# Altium PCB Intelligent_Agriculture.PcbDoc (part 3 of 5)
Units mm, origin at the board's own origin, x right, y up, seen from the top; angles counter-clockwise.
Board outline 99.69 x 99.69 mm, 2 copper layers (Top Layer, Bottom Layer); 90 components, 60 nets, 339 pads, 86 vias.
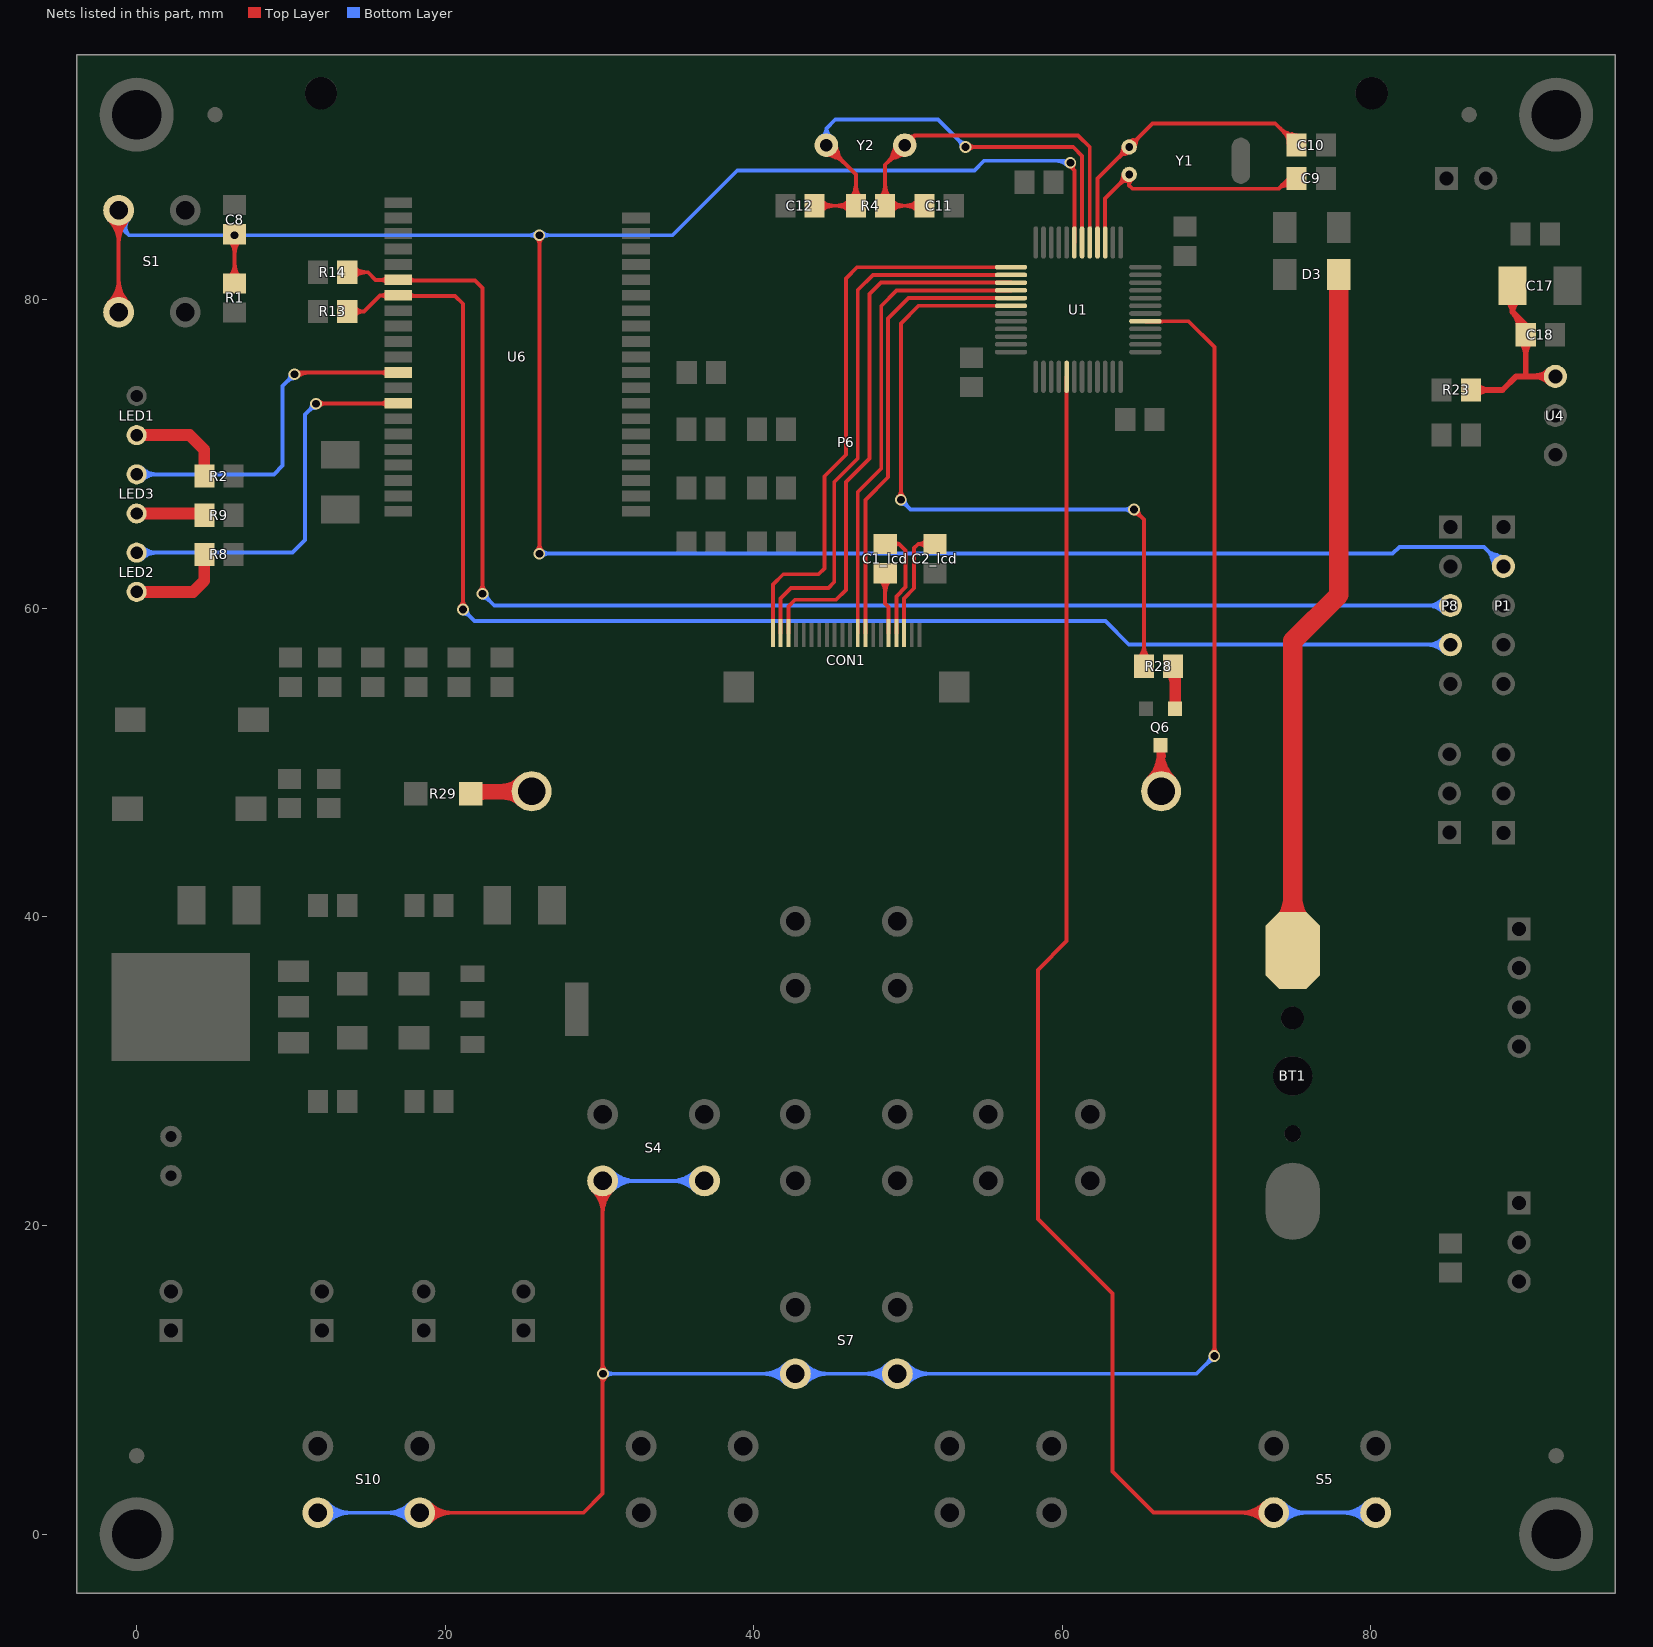
[diagram p3: the nets of this part, all layers, seen from the top]

## Via types
v1: diameter 0.762, hole 0.508, Top Layer to Bottom Layer, tented both sides, 82 vias
v2: diameter 4.8, hole 3.2, Top Layer to Bottom Layer, tented both sides, 4 vias

## Nets (pads, with @x,y where several pads share a name; then routed paths per layer and width w, separated by ;. In a path a pad name is that pad's centre, name@x,y a point inside that pad or via, vN(x,y) a via of type N, cw(c..) or ccw(c..) an arc to the next point about the centre after c; other vN are vias at no path point) (continued)
KEY_O3: S4.2 S4.3 S7.2 S7.3 S10.2 S10.3 U1.41 | length 341.8
  Top Layer w0.254: S10.2@18.352,1.385 28.956,1.385 30.198,2.627 S4.3@30.198,22.892 ; 66.472,78.581 65.411,78.581 U1.41@65.378,78.613 68.182,78.613 69.85,76.945 v1(69.85,11.54) ; S10.2@18.79,0.947 cw(c19.846,-0.109) 19.846,1.385 ; S10.2@18.79,0.947 cw(c19.846,-0.109) 19.846,1.385 ; S10.2@18.79,0.947 cw(c19.846,-0.109) 19.846,1.385 ; S10.2@18.79,1.823 ccw(c19.846,2.879) 19.846,1.385 ; S10.2@18.79,1.823 ccw(c19.846,2.879) 19.846,1.385 ; S10.2@18.79,1.823 ccw(c19.846,2.879) 19.846,1.385 ; S10.2@18.969,0.768 cw(c20.46,-0.723) 20.46,1.385 ; S10.2@18.969,0.768 cw(c20.46,-0.723) 20.46,1.385 ; S10.2@18.969,0.768 cw(c20.46,-0.723) 20.46,1.385 ; S10.2@18.969,2.002 ccw(c20.46,3.493) 20.46,1.385 ; S10.2@18.969,2.002 ccw(c20.46,3.493) 20.46,1.385 ; S10.2@18.969,2.002 ccw(c20.46,3.493) 20.46,1.385 ; S4.3@29.581,22.275 cw(c28.09,20.784) 30.198,20.784 ; S4.3@29.581,22.275 cw(c28.09,20.784) 30.198,20.784 ; S4.3@29.581,22.275 cw(c28.09,20.784) 30.198,20.784 ; S4.3@29.76,22.454 cw(c28.704,21.398) 30.198,21.398 ; S4.3@29.76,22.454 cw(c28.704,21.398) 30.198,21.398 ; S4.3@29.76,22.454 cw(c28.704,21.398) 30.198,21.398 ; v1@30.051,10.212 cw(c29.697,9.858) 30.198,9.858 ; v1@30.051,10.212 cw(c29.697,9.858) 30.198,9.858 ; v1@30.051,10.212 cw(c29.697,9.858) 30.198,9.858 ; v1@30.051,10.572 ccw(c29.697,10.926) 30.198,10.926 ; v1@30.051,10.572 ccw(c29.697,10.926) 30.198,10.926 ; v1@30.051,10.572 ccw(c29.697,10.926) 30.198,10.926 ; 30.198,9.699 cw(c30.924,9.699) v1@30.411,10.212 ; 30.198,9.699 cw(c30.924,9.699) v1@30.411,10.212 ; 30.198,9.699 cw(c30.924,9.699) v1@30.411,10.212 ; 30.198,11.085 ccw(c30.924,11.085) v1@30.411,10.572 ; 30.198,11.085 ccw(c30.924,11.085) v1@30.411,10.572 ; 30.198,11.085 ccw(c30.924,11.085) v1@30.411,10.572 ; 30.198,20.784 cw(c32.306,20.784) S4.3@30.815,22.275 ; 30.198,20.784 cw(c32.306,20.784) S4.3@30.815,22.275 ; 30.198,20.784 cw(c32.306,20.784) S4.3@30.815,22.275 ; 30.198,21.398 cw(c31.692,21.398) S4.3@30.636,22.454 ; 30.198,21.398 cw(c31.692,21.398) S4.3@30.636,22.454 ; 30.198,21.398 cw(c31.692,21.398) S4.3@30.636,22.454 ; v1@69.67,11.72 ccw(c69.237,12.153) 69.85,12.153 ; v1@69.67,11.72 ccw(c69.237,12.153) 69.85,12.153 ; v1@69.67,11.72 ccw(c69.237,12.153) 69.85,12.153 ; 69.85,12.153 ccw(c70.463,12.153) v1@70.03,11.72 ; 69.85,12.153 ccw(c70.463,12.153) v1@70.03,11.72 ; 69.85,12.153 ccw(c70.463,12.153) v1@70.03,11.72
  Bottom Layer w0.254: S10.3@11.748,1.385 S10.2@18.352,1.385 ; S4.3@30.198,22.892 S4.2@36.802,22.892 ; v1(30.231,10.392) S7.3@42.698,10.392 S7.2@49.302,10.392 68.702,10.392 v1(69.85,11.54) ; S10.3@12.186,0.947 cw(c13.242,-0.109) 13.242,1.385 ; S10.3@12.186,0.947 cw(c13.242,-0.109) 13.242,1.385 ; S10.3@12.186,0.947 cw(c13.242,-0.109) 13.242,1.385 ; S10.3@12.186,1.823 ccw(c13.242,2.879) 13.242,1.385 ; S10.3@12.186,1.823 ccw(c13.242,2.879) 13.242,1.385 ; S10.3@12.186,1.823 ccw(c13.242,2.879) 13.242,1.385 ; S10.3@12.365,0.768 cw(c13.856,-0.723) 13.856,1.385 ; S10.3@12.365,0.768 cw(c13.856,-0.723) 13.856,1.385 ; S10.3@12.365,0.768 cw(c13.856,-0.723) 13.856,1.385 ; S10.3@12.365,2.002 ccw(c13.856,3.493) 13.856,1.385 ; S10.3@12.365,2.002 ccw(c13.856,3.493) 13.856,1.385 ; S10.3@12.365,2.002 ccw(c13.856,3.493) 13.856,1.385 ; 16.244,1.385 ccw(c16.244,3.493) S10.2@17.735,2.002 ; 16.244,1.385 cw(c16.244,-0.723) S10.2@17.735,0.768 ; 16.244,1.385 ccw(c16.244,3.493) S10.2@17.735,2.002 ; 16.244,1.385 cw(c16.244,-0.723) S10.2@17.735,0.768 ; 16.244,1.385 ccw(c16.244,3.493) S10.2@17.735,2.002 ; 16.244,1.385 cw(c16.244,-0.723) S10.2@17.735,0.768 ; 16.858,1.385 ccw(c16.858,2.879) S10.2@17.914,1.823 ; 16.858,1.385 cw(c16.858,-0.109) S10.2@17.914,0.947 ; 16.858,1.385 ccw(c16.858,2.879) S10.2@17.914,1.823 ; 16.858,1.385 cw(c16.858,-0.109) S10.2@17.914,0.947 ; 16.858,1.385 ccw(c16.858,2.879) S10.2@17.914,1.823 ; 16.858,1.385 cw(c16.858,-0.109) S10.2@17.914,0.947 ; v1@30.411,10.212 cw(c30.844,9.779) 30.844,10.392 ; v1@30.411,10.212 cw(c30.844,9.779) 30.844,10.392 ; v1@30.411,10.212 cw(c30.844,9.779) 30.844,10.392 ; v1@30.411,10.572 ccw(c30.844,11.005) 30.844,10.392 ; v1@30.411,10.572 ccw(c30.844,11.005) 30.844,10.392 ; v1@30.411,10.572 ccw(c30.844,11.005) 30.844,10.392 ; S4.3@30.636,22.454 cw(c31.692,21.398) 31.692,22.892 ; S4.3@30.636,22.454 cw(c31.692,21.398) 31.692,22.892 ; S4.3@30.636,22.454 cw(c31.692,21.398) 31.692,22.892 ; S4.3@30.636,23.33 ccw(c31.692,24.386) 31.692,22.892 ; S4.3@30.636,23.33 ccw(c31.692,24.386) 31.692,22.892 ; S4.3@30.636,23.33 ccw(c31.692,24.386) 31.692,22.892 ; S4.3@30.815,22.275 cw(c32.306,20.784) 32.306,22.892 ; S4.3@30.815,22.275 cw(c32.306,20.784) 32.306,22.892 ; S4.3@30.815,22.275 cw(c32.306,20.784) 32.306,22.892 ; S4.3@30.815,23.509 ccw(c32.306,25) 32.306,22.892 ; S4.3@30.815,23.509 ccw(c32.306,25) 32.306,22.892 ; S4.3@30.815,23.509 ccw(c32.306,25) 32.306,22.892 ; 34.694,22.892 ccw(c34.694,25) S4.2@36.185,23.509 ; 34.694,22.892 cw(c34.694,20.784) S4.2@36.185,22.275 ; 34.694,22.892 ccw(c34.694,25) S4.2@36.185,23.509 ; 34.694,22.892 cw(c34.694,20.784) S4.2@36.185,22.275 ; 34.694,22.892 ccw(c34.694,25) S4.2@36.185,23.509 ; 34.694,22.892 cw(c34.694,20.784) S4.2@36.185,22.275 ; 35.308,22.892 ccw(c35.308,24.386) S4.2@36.364,23.33 ; 35.308,22.892 cw(c35.308,21.398) S4.2@36.364,22.454 ; 35.308,22.892 ccw(c35.308,24.386) S4.2@36.364,23.33 ; 35.308,22.892 cw(c35.308,21.398) S4.2@36.364,22.454 ; 35.308,22.892 ccw(c35.308,24.386) S4.2@36.364,23.33 ; 35.308,22.892 cw(c35.308,21.398) S4.2@36.364,22.454 ; 40.59,10.392 ccw(c40.59,12.5) S7.3@42.081,11.009 ; 40.59,10.392 cw(c40.59,8.284) S7.3@42.081,9.775 ; 40.59,10.392 ccw(c40.59,12.5) S7.3@42.081,11.009 ; 40.59,10.392 cw(c40.59,8.284) S7.3@42.081,9.775 ; 40.59,10.392 ccw(c40.59,12.5) S7.3@42.081,11.009 ; 40.59,10.392 cw(c40.59,8.284) S7.3@42.081,9.775 ; 41.204,10.392 ccw(c41.204,11.886) S7.3@42.26,10.83 ; 41.204,10.392 cw(c41.204,8.898) S7.3@42.26,9.954 ; 41.204,10.392 ccw(c41.204,11.886) S7.3@42.26,10.83 ; 41.204,10.392 cw(c41.204,8.898) S7.3@42.26,9.954 ; 41.204,10.392 ccw(c41.204,11.886) S7.3@42.26,10.83 ; 41.204,10.392 cw(c41.204,8.898) S7.3@42.26,9.954 ; S7.3@43.136,9.954 cw(c44.192,8.898) 44.192,10.392 ; S7.3@43.136,9.954 cw(c44.192,8.898) 44.192,10.392 ; S7.3@43.136,9.954 cw(c44.192,8.898) 44.192,10.392 ; S7.3@43.136,10.83 ccw(c44.192,11.886) 44.192,10.392 ; S7.3@43.136,10.83 ccw(c44.192,11.886) 44.192,10.392 ; S7.3@43.136,10.83 ccw(c44.192,11.886) 44.192,10.392 ; S7.3@43.315,9.775 cw(c44.806,8.284) 44.806,10.392 ; S7.3@43.315,9.775 cw(c44.806,8.284) 44.806,10.392 ; S7.3@43.315,9.775 cw(c44.806,8.284) 44.806,10.392 ; S7.3@43.315,11.009 ccw(c44.806,12.5) 44.806,10.392 ; S7.3@43.315,11.009 ccw(c44.806,12.5) 44.806,10.392 ; S7.3@43.315,11.009 ccw(c44.806,12.5) 44.806,10.392 ; 47.194,10.392 ccw(c47.194,12.5) S7.2@48.685,11.009 ; 47.194,10.392 cw(c47.194,8.284) S7.2@48.685,9.775 ; 47.194,10.392 ccw(c47.194,12.5) S7.2@48.685,11.009 ; 47.194,10.392 cw(c47.194,8.284) S7.2@48.685,9.775 ; 47.194,10.392 ccw(c47.194,12.5) S7.2@48.685,11.009 ; 47.194,10.392 cw(c47.194,8.284) S7.2@48.685,9.775 ; 47.808,10.392 ccw(c47.808,11.886) S7.2@48.864,10.83 ; 47.808,10.392 cw(c47.808,8.898) S7.2@48.864,9.954 ; 47.808,10.392 ccw(c47.808,11.886) S7.2@48.864,10.83 ; 47.808,10.392 cw(c47.808,8.898) S7.2@48.864,9.954 ; 47.808,10.392 ccw(c47.808,11.886) S7.2@48.864,10.83 ; 47.808,10.392 cw(c47.808,8.898) S7.2@48.864,9.954 ; S7.2@49.74,9.954 cw(c50.796,8.898) 50.796,10.392 ; S7.2@49.74,9.954 cw(c50.796,8.898) 50.796,10.392 ; S7.2@49.74,9.954 cw(c50.796,8.898) 50.796,10.392 ; S7.2@49.74,10.83 ccw(c50.796,11.886) 50.796,10.392 ; S7.2@49.74,10.83 ccw(c50.796,11.886) 50.796,10.392 ; S7.2@49.74,10.83 ccw(c50.796,11.886) 50.796,10.392 ; S7.2@49.919,9.775 cw(c51.41,8.284) 51.41,10.392 ; S7.2@49.919,9.775 cw(c51.41,8.284) 51.41,10.392 ; S7.2@49.919,9.775 cw(c51.41,8.284) 51.41,10.392 ; S7.2@49.919,11.009 ccw(c51.41,12.5) 51.41,10.392 ; S7.2@49.919,11.009 ccw(c51.41,12.5) 51.41,10.392 ; S7.2@49.919,11.009 ccw(c51.41,12.5) 51.41,10.392 ; 69.416,11.106 ccw(c68.983,11.54) v1@69.596,11.54 ; 69.416,11.106 cw(c69.85,10.673) v1@69.85,11.286 ; 69.416,11.106 ccw(c68.983,11.54) v1@69.596,11.54 ; 69.416,11.106 cw(c69.85,10.673) v1@69.85,11.286 ; 69.416,11.106 ccw(c68.983,11.54) v1@69.596,11.54 ; 69.416,11.106 cw(c69.85,10.673) v1@69.85,11.286
KEY_WAIT: S5.2 S5.3 U1.29 | length 142.8
  Top Layer w0.254: U1.29@60.274,75.009 60.274,38.43 58.42,36.576 58.42,20.43 63.246,15.604 63.246,4.047 65.901,1.392 S5.3@73.698,1.392 ; 71.59,1.392 ccw(c71.59,3.5) S5.3@73.081,2.009 ; 71.59,1.392 cw(c71.59,-0.716) S5.3@73.081,0.775 ; 71.59,1.392 ccw(c71.59,3.5) S5.3@73.081,2.009 ; 71.59,1.392 cw(c71.59,-0.716) S5.3@73.081,0.775 ; 71.59,1.392 ccw(c71.59,3.5) S5.3@73.081,2.009 ; 71.59,1.392 cw(c71.59,-0.716) S5.3@73.081,0.775 ; 72.204,1.392 ccw(c72.204,2.886) S5.3@73.26,1.83 ; 72.204,1.392 cw(c72.204,-0.102) S5.3@73.26,0.954 ; 72.204,1.392 ccw(c72.204,2.886) S5.3@73.26,1.83 ; 72.204,1.392 cw(c72.204,-0.102) S5.3@73.26,0.954 ; 72.204,1.392 ccw(c72.204,2.886) S5.3@73.26,1.83 ; 72.204,1.392 cw(c72.204,-0.102) S5.3@73.26,0.954
  Bottom Layer w0.254: S5.3@73.698,1.392 S5.2@80.302,1.392 ; S5.3@74.136,0.954 cw(c75.192,-0.102) 75.192,1.392 ; S5.3@74.136,0.954 cw(c75.192,-0.102) 75.192,1.392 ; S5.3@74.136,0.954 cw(c75.192,-0.102) 75.192,1.392 ; S5.3@74.136,1.83 ccw(c75.192,2.886) 75.192,1.392 ; S5.3@74.136,1.83 ccw(c75.192,2.886) 75.192,1.392 ; S5.3@74.136,1.83 ccw(c75.192,2.886) 75.192,1.392 ; S5.3@74.315,0.775 cw(c75.806,-0.716) 75.806,1.392 ; S5.3@74.315,0.775 cw(c75.806,-0.716) 75.806,1.392 ; S5.3@74.315,0.775 cw(c75.806,-0.716) 75.806,1.392 ; S5.3@74.315,2.009 ccw(c75.806,3.5) 75.806,1.392 ; S5.3@74.315,2.009 ccw(c75.806,3.5) 75.806,1.392 ; S5.3@74.315,2.009 ccw(c75.806,3.5) 75.806,1.392 ; 78.194,1.392 ccw(c78.194,3.5) S5.2@79.685,2.009 ; 78.194,1.392 cw(c78.194,-0.716) S5.2@79.685,0.775 ; 78.194,1.392 ccw(c78.194,3.5) S5.2@79.685,2.009 ; 78.194,1.392 cw(c78.194,-0.716) S5.2@79.685,0.775 ; 78.194,1.392 ccw(c78.194,3.5) S5.2@79.685,2.009 ; 78.194,1.392 cw(c78.194,-0.716) S5.2@79.685,0.775 ; 78.808,1.392 ccw(c78.808,2.886) S5.2@79.864,1.83 ; 78.808,1.392 cw(c78.808,-0.102) S5.2@79.864,0.954 ; 78.808,1.392 ccw(c78.808,2.886) S5.2@79.864,1.83 ; 78.808,1.392 cw(c78.808,-0.102) S5.2@79.864,0.954 ; 78.808,1.392 ccw(c78.808,2.886) S5.2@79.864,1.83 ; 78.808,1.392 cw(c78.808,-0.102) S5.2@79.864,0.954
LCD_CS: CON1.1 U1.13 | length 37.3
  Top Layer w0.254: CON1.1@41.238,58.397 41.238,61.541 41.91,62.213 44.196,62.213 44.577,62.594 44.577,68.563 45.974,69.96 45.974,81.39 46.697,82.113 U1.13@56.67,82.113
LCD_LED: R28.2 U1.18 | length 65.3
  Top Layer w0.254: v1(49.53,67.039) 49.53,78.469 50.674,79.613 U1.18@56.67,79.613 ; R28.2@65.281,56.249 65.281,65.639 65.281,65.766 v1(64.643,66.404) ; v1@49.35,67.219 ccw(c48.917,67.652) 49.53,67.652 ; v1@49.35,67.219 ccw(c48.917,67.652) 49.53,67.652 ; v1@49.35,67.219 ccw(c48.917,67.652) 49.53,67.652 ; 49.53,67.652 ccw(c50.143,67.652) v1@49.71,67.219 ; 49.53,67.652 ccw(c50.143,67.652) v1@49.71,67.219 ; 49.53,67.652 ccw(c50.143,67.652) v1@49.71,67.219 ; v1@64.643,66.15 cw(c64.643,65.537) 65.077,65.97 ; v1@64.643,66.15 cw(c64.643,65.537) 65.077,65.97 ; v1@64.643,66.15 cw(c64.643,65.537) 65.077,65.97 ; v1(64.643,66.404) ccw(c65.078,66.493) 64.963,66.064 ; v1(64.643,66.404) cw(c64.554,65.969) 64.983,66.084 ; v1(64.643,66.404) ccw(c65.078,66.493) 64.963,66.064 ; v1(64.643,66.404) cw(c64.554,65.969) 64.983,66.084 ; v1(64.643,66.404) ccw(c65.078,66.493) 64.963,66.064 ; v1(64.643,66.404) cw(c64.554,65.969) 64.983,66.084 ; v1@64.897,66.404 ccw(c65.51,66.404) 65.077,65.97 ; v1@64.897,66.404 ccw(c65.51,66.404) 65.077,65.97 ; v1@64.897,66.404 ccw(c65.51,66.404) 65.077,65.97 ; R28.2@64.911,56.719 ccw(c64.018,57.612) 65.281,57.612 ; R28.2@64.911,56.719 ccw(c64.018,57.612) 65.281,57.612 ; R28.2@64.911,56.719 ccw(c64.018,57.612) 65.281,57.612 ; 65.281,57.612 ccw(c66.544,57.612) R28.2@65.651,56.719 ; 65.281,57.612 ccw(c66.544,57.612) R28.2@65.651,56.719 ; 65.281,57.612 ccw(c66.544,57.612) R28.2@65.651,56.719
  Bottom Layer w0.254: v1(49.53,67.039) 50.165,66.404 v1(64.643,66.404) ; v1@49.53,66.785 cw(c49.53,66.172) 49.964,66.605 ; v1@49.53,66.785 cw(c49.53,66.172) 49.964,66.605 ; v1@49.53,66.785 cw(c49.53,66.172) 49.964,66.605 ; v1@49.784,67.039 ccw(c50.397,67.039) 49.964,66.605 ; v1@49.784,67.039 ccw(c50.397,67.039) 49.964,66.605 ; v1@49.784,67.039 ccw(c50.397,67.039) 49.964,66.605 ; 64.03,66.404 ccw(c64.03,67.017) v1@64.463,66.584 ; 64.03,66.404 cw(c64.03,65.791) v1@64.463,66.224 ; 64.03,66.404 ccw(c64.03,67.017) v1@64.463,66.584 ; 64.03,66.404 cw(c64.03,65.791) v1@64.463,66.224 ; 64.03,66.404 ccw(c64.03,67.017) v1@64.463,66.584 ; 64.03,66.404 cw(c64.03,65.791) v1@64.463,66.224
LCD_RS: CON1.3 U1.15 | length 35.2
  Top Layer w0.254: CON1.3@42.238,58.397 42.238,60.128 42.672,60.562 45.339,60.562 45.974,61.197 45.974,68.182 47.498,69.706 47.498,80.374 48.237,81.113 U1.15@56.67,81.113
LCD_RST: CON1.2 U1.14 | length 36.1
  Top Layer w0.254: CON1.2@41.738,58.397 41.738,60.644 42.418,61.324 44.831,61.324 45.212,61.705 45.212,68.182 46.736,69.706 46.736,80.628 47.721,81.613 U1.14@56.67,81.613
LCD_SCK: CON1.12 U1.16 | length 30.7
  Top Layer w0.254: CON1.12@46.738,58.397 46.738,67.549 48.26,69.071 48.26,79.612 49.261,80.613 U1.16@56.67,80.613
LCD_SDA: CON1.13 U1.17 | length 29.5
  Top Layer w0.254: CON1.13@47.238,58.397 47.238,67.033 48.705,68.5 48.705,78.787 50.031,80.113 U1.17@56.67,80.113
NetBT1_1: BT1.1 D3.1 | length 57.7
  Top Layer w1.27: BT1.1@74.93,37.829 74.93,57.895 77.915,60.88 D3.1@77.915,81.649 ; BT1.1@74.142,39.367 ccw(c72.238,41.271) 74.93,41.271 ; BT1.1@74.142,39.367 ccw(c72.238,41.271) 74.93,41.271 ; BT1.1@74.142,39.367 ccw(c72.238,41.271) 74.93,41.271 ; 74.93,41.271 ccw(c77.622,41.271) BT1.1@75.718,39.367 ; 74.93,41.271 ccw(c77.622,41.271) BT1.1@75.718,39.367 ; 74.93,41.271 ccw(c77.622,41.271) BT1.1@75.718,39.367
NetC1_lcd_1: C1_lcd.1 CON1.16 | length 9.9
  Top Layer w0.254: C1_lcd.1@48.514,62.279 48.514,60.308 48.738,60.084 CON1.16@48.738,58.397 ; C1_lcd.1@48.144,61.909 cw(c47.251,61.016) 48.514,61.016 ; C1_lcd.1@48.144,61.909 cw(c47.251,61.016) 48.514,61.016 ; C1_lcd.1@48.144,61.909 cw(c47.251,61.016) 48.514,61.016 ; 48.514,61.016 cw(c49.777,61.016) C1_lcd.1@48.884,61.909 ; 48.514,61.016 cw(c49.777,61.016) C1_lcd.1@48.884,61.909 ; 48.514,61.016 cw(c49.777,61.016) C1_lcd.1@48.884,61.909
NetC1_lcd_2: C1_lcd.2 CON1.17 | length 9.6
  Top Layer w0.254: C1_lcd.2@48.514,64.179 49.418,64.179 ; CON1.17@49.238,58.397 49.238,60.778 49.835,61.375 49.835,63.762 49.418,64.179 ; C1_lcd.2@49.092,63.967 cw(c49.418,63.822) 49.418,64.179 ; C1_lcd.2@49.092,63.967 cw(c49.418,63.822) 49.418,64.179 ; C1_lcd.2@49.092,63.967 cw(c49.418,63.822) 49.418,64.179 ; C1_lcd.2@49.092,64.391 ccw(c49.418,64.536) 49.418,64.179 ; C1_lcd.2@49.092,64.391 ccw(c49.418,64.536) 49.418,64.179 ; C1_lcd.2@49.092,64.391 ccw(c49.418,64.536) 49.418,64.179
NetC2_lcd_1: C2_lcd.1 CON1.18 | length 10.6
  Top Layer w0.254: CON1.18@49.738,58.397 49.738,60.65 50.394,61.305 50.394,63.915 50.658,64.179 ; C2_lcd.1@51.181,64.179 50.658,64.179 ; 50.658,64.179 ccw(c50.658,64.839) C2_lcd.1@51.206,64.471 ; 50.658,64.179 cw(c50.658,63.519) C2_lcd.1@51.206,63.887 ; 50.658,64.179 ccw(c50.658,64.839) C2_lcd.1@51.206,64.471 ; 50.658,64.179 cw(c50.658,63.519) C2_lcd.1@51.206,63.887 ; 50.658,64.179 ccw(c50.658,64.839) C2_lcd.1@51.206,64.471 ; 50.658,64.179 cw(c50.658,63.519) C2_lcd.1@51.206,63.887
NetC17_1: C17.1 C18.1 R23.2 U4.3 | length 41.3
  Top Layer w0.381: R23.2@86.485,74.156 88.524,74.156 89.408,75.04 90.043,75.04 ; C17.1@89.179,80.907 89.179,79.206 ; U4.3@91.946,75.043 U4.3@91.949,75.04 90.043,75.04 ; R23.2@86.81,73.831 cw(c87.594,73.047) 87.594,74.156 ; R23.2@86.81,73.831 cw(c87.594,73.047) 87.594,74.156 ; R23.2@86.81,73.831 cw(c87.594,73.047) 87.594,74.156 ; R23.2@86.81,74.481 ccw(c87.594,75.265) 87.594,74.156 ; R23.2@86.81,74.481 ccw(c87.594,75.265) 87.594,74.156 ; R23.2@86.81,74.481 ccw(c87.594,75.265) 87.594,74.156 ; C17.1@88.776,79.973 cw(c88.246,79.206) 89.179,79.206 ; C17.1@88.776,79.973 cw(c88.246,79.206) 89.179,79.206 ; C17.1@88.776,79.973 cw(c88.246,79.206) 89.179,79.206 ; 89.179,79.206 cw(c88.152,78.178) C18.1@89.581,77.916 ; 89.179,79.206 cw(c90.112,79.206) C17.1@89.582,79.973 ; 89.179,79.206 cw(c88.152,78.178) C18.1@89.581,77.916 ; 89.179,79.206 cw(c90.112,79.206) C17.1@89.582,79.973 ; 89.179,79.206 cw(c88.152,78.178) C18.1@89.581,77.916 ; 89.179,79.206 cw(c90.112,79.206) C17.1@89.582,79.973 ; 89.179,79.206 90.033,78.352 C18.1@90.033,77.732 90.033,75.05 90.043,75.04 ; 89.692,78.693 cw(c89.019,78.019) C18.1@89.956,77.847 ; 89.692,78.693 cw(c89.019,78.019) C18.1@89.956,77.847 ; 89.692,78.693 cw(c89.019,78.019) C18.1@89.956,77.847 ; C18.1@89.708,77.307 cw(c88.923,76.523) 90.033,76.523 ; C18.1@89.708,77.307 cw(c88.923,76.523) 90.033,76.523 ; C18.1@89.708,77.307 cw(c88.923,76.523) 90.033,76.523 ; 90.033,76.523 cw(c91.142,76.523) C18.1@90.358,77.307 ; 90.033,76.523 cw(c91.142,76.523) C18.1@90.358,77.307 ; 90.033,76.523 cw(c91.142,76.523) C18.1@90.358,77.307 ; 90.598,75.04 ccw(c90.598,76.391) U4.3@91.553,75.436 ; 90.598,75.04 cw(c90.598,73.689) U4.3@91.553,74.644 ; 90.598,75.04 ccw(c90.598,76.391) U4.3@91.553,75.436 ; 90.598,75.04 cw(c90.598,73.689) U4.3@91.553,74.644 ; 90.598,75.04 ccw(c90.598,76.391) U4.3@91.553,75.436 ; 90.598,75.04 cw(c90.598,73.689) U4.3@91.553,74.644
NetLED1_1: LED1.1 R2.1 | length 6.5
  Top Layer w0.762: LED1.1@0,71.23 3.446,71.23 4.384,70.292 R2.1@4.384,68.58
NetLED2_1: LED2.1 R8.1 | length 6.4
  Top Layer w0.762: LED2.1@0,61.07 3.666,61.07 4.384,61.788 R8.1@4.384,63.5
NetLED2_2: LED2.2 U6.33 | length 39.5
  Top Layer w0.254: v1(11.616,73.262) 11.631,73.277 U6.33@16.477,73.277 ; v1@11.796,73.082 cw(c12.265,72.613) 12.265,73.277 ; v1@11.796,73.082 cw(c12.265,72.613) 12.265,73.277 ; v1@11.796,73.082 cw(c12.265,72.613) 12.265,73.277 ; v1@11.796,73.442 ccw(c12.193,73.839) 12.193,73.277 ; v1@11.796,73.442 ccw(c12.193,73.839) 12.193,73.277 ; v1@11.796,73.442 ccw(c12.193,73.839) 12.193,73.277 ; 15.822,73.277 ccw(c15.822,73.832) U6.33@16.214,73.44 ; 15.822,73.277 ccw(c15.822,73.832) U6.33@16.214,73.44 ; 15.822,73.277 ccw(c15.822,73.832) U6.33@16.214,73.44 ; 15.846,73.277 cw(c15.846,72.756) U6.33@16.214,73.124 ; 15.846,73.277 cw(c15.846,72.756) U6.33@16.214,73.124 ; 15.846,73.277 cw(c15.846,72.756) U6.33@16.214,73.124
  Bottom Layer w0.254: LED2.2@0,63.61 10.092,63.61 10.922,64.44 10.922,72.568 v1(11.616,73.262) ; LED2.2@0.37,63.24 cw(c1.263,62.347) 1.263,63.61 ; LED2.2@0.37,63.24 cw(c1.263,62.347) 1.263,63.61 ; LED2.2@0.37,63.24 cw(c1.263,62.347) 1.263,63.61 ; LED2.2@0.37,63.98 ccw(c1.263,64.873) 1.263,63.61 ; LED2.2@0.37,63.98 ccw(c1.263,64.873) 1.263,63.61 ; LED2.2@0.37,63.98 ccw(c1.263,64.873) 1.263,63.61 ; 11.182,72.828 ccw(c10.749,73.262) v1@11.362,73.262 ; 11.182,72.828 cw(c11.616,72.395) v1@11.616,73.008 ; 11.182,72.828 ccw(c10.749,73.262) v1@11.362,73.262 ; 11.182,72.828 cw(c11.616,72.395) v1@11.616,73.008 ; 11.182,72.828 ccw(c10.749,73.262) v1@11.362,73.262 ; 11.182,72.828 cw(c11.616,72.395) v1@11.616,73.008
NetLED3_1: LED3.1 R9.1 | length 5.9
  Top Layer w0.762: LED3.1@0,66.15 R9.1@4.274,66.15 ; 3.71,66.15 cw(c3.71,65.466) R9.1@4.194,65.95 ; 3.71,66.15 cw(c3.71,65.466) R9.1@4.194,65.95 ; 3.71,66.15 cw(c3.71,65.466) R9.1@4.194,65.95
NetLED3_2: LED3.2 U6.31 | length 35.9
  Top Layer w0.254: v1(10.224,75.172) 10.329,75.277 U6.31@16.477,75.277 ; v1@10.404,74.992 cw(c11.091,74.305) 11.091,75.277 ; v1@10.404,74.992 cw(c11.091,74.305) 11.091,75.277 ; v1@10.404,74.992 cw(c11.091,74.305) 11.091,75.277 ; 15.822,75.277 ccw(c15.822,75.832) U6.31@16.214,75.44 ; 15.822,75.277 ccw(c15.822,75.832) U6.31@16.214,75.44 ; 15.822,75.277 ccw(c15.822,75.832) U6.31@16.214,75.44 ; 15.846,75.277 cw(c15.846,74.756) U6.31@16.214,75.124 ; 15.846,75.277 cw(c15.846,74.756) U6.31@16.214,75.124 ; 15.846,75.277 cw(c15.846,74.756) U6.31@16.214,75.124
  Bottom Layer w0.254: LED3.2@0,68.69 8.89,68.69 9.462,69.262 9.462,74.41 v1(10.224,75.172) ; LED3.2@0.37,68.32 cw(c1.263,67.427) 1.263,68.69 ; LED3.2@0.37,68.32 cw(c1.263,67.427) 1.263,68.69 ; LED3.2@0.37,68.32 cw(c1.263,67.427) 1.263,68.69 ; LED3.2@0.37,69.06 ccw(c1.263,69.953) 1.263,68.69 ; LED3.2@0.37,69.06 ccw(c1.263,69.953) 1.263,68.69 ; LED3.2@0.37,69.06 ccw(c1.263,69.953) 1.263,68.69 ; 9.79,74.738 ccw(c9.357,75.172) v1@9.97,75.172 ; 9.79,74.738 cw(c10.224,74.305) v1@10.224,74.918 ; 9.79,74.738 ccw(c9.357,75.172) v1@9.97,75.172 ; 9.79,74.738 cw(c10.224,74.305) v1@10.224,74.918 ; 9.79,74.738 ccw(c9.357,75.172) v1@9.97,75.172 ; 9.79,74.738 cw(c10.224,74.305) v1@10.224,74.918
NetP6_1: P6.1 R29.1 | length 15.3
  Top Layer w0.762: P6.1@25.6,48.15 P6.1@25.718,48.268
  Top Layer w1.016: R29.1@21.844,48.116 P6.1@25.566,48.116 ; R29.1@21.834,47.814 cw(c22.562,47.086) 22.562,48.116 ; R29.1@21.834,47.814 cw(c22.562,47.086) 22.562,48.116 ; R29.1@21.834,47.814 cw(c22.562,47.086) 22.562,48.116 ; 23.606,48.116 ccw(c23.606,50.144) P6.1@25.04,48.71 ; 23.606,48.116 ccw(c23.606,50.144) P6.1@25.04,48.71 ; 23.606,48.116 ccw(c23.606,50.144) P6.1@25.04,48.71 ; 23.77,48.116 cw(c23.77,46.32) P6.1@25.04,47.59 ; 23.77,48.116 cw(c23.77,46.32) P6.1@25.04,47.59 ; 23.77,48.116 cw(c23.77,46.32) P6.1@25.04,47.59
NetP6_2: P6.2 Q6.3 | length 22.3
  Top Layer w0.508: Q6.3@66.358,51.137 66.358,48.192 P6.2@66.4,48.15 ; P6.2@65.66,48.89 ccw(c63.976,50.574) 66.358,50.574 ; P6.2@65.66,48.89 ccw(c63.976,50.574) 66.358,50.574 ; P6.2@65.66,48.89 ccw(c63.976,50.574) 66.358,50.574 ; Q6.3@66.219,50.973 cw(c65.885,50.639) 66.358,50.639 ; Q6.3@66.219,50.973 cw(c65.885,50.639) 66.358,50.639 ; Q6.3@66.219,50.973 cw(c65.885,50.639) 66.358,50.639 ; 66.358,49.55 ccw(c67.8,49.55) P6.2@66.78,48.53 ; 66.358,49.55 ccw(c67.8,49.55) P6.2@66.78,48.53 ; 66.358,49.55 ccw(c67.8,49.55) P6.2@66.78,48.53 ; 66.358,50.639 cw(c66.831,50.639) Q6.3@66.497,50.973 ; 66.358,50.639 cw(c66.831,50.639) Q6.3@66.497,50.973 ; 66.358,50.639 cw(c66.831,50.639) Q6.3@66.497,50.973 ; Q6.3@66.358,50.777 ccw(c69.027,50.777) P6.2@67.14,48.89 ; Q6.3@66.358,50.777 ccw(c69.027,50.777) P6.2@67.14,48.89 ; Q6.3@66.358,50.777 ccw(c69.027,50.777) P6.2@67.14,48.89 ; 66.451,50.43 cw(c67.194,50.629) Q6.3@66.528,51.014 ; 66.451,50.43 cw(c67.194,50.629) Q6.3@66.528,51.014 ; 66.451,50.43 cw(c67.194,50.629) Q6.3@66.528,51.014
NetP8_3: P8.3 R14.2 U6.25 | length 120.3
  Top Layer w0.254: R14.2@13.65,81.788 14.986,81.788 15.492,81.282 U6.25@16.922,81.282 ; U6.25@16.744,81.257 21.919,81.257 22.416,80.76 v1(22.416,60.948) ; R14.2@14.02,81.418 cw(c14.913,80.525) 14.913,81.788 ; R14.2@14.02,81.418 cw(c14.913,80.525) 14.913,81.788 ; R14.2@14.02,81.418 cw(c14.913,80.525) 14.913,81.788 ; R14.2@14.02,82.158 ccw(c14.913,83.051) 14.913,81.788 ; R14.2@14.02,82.158 ccw(c14.913,83.051) 14.913,81.788 ; R14.2@14.02,82.158 ccw(c14.913,83.051) 14.913,81.788 ; 15.834,81.282 ccw(c15.834,81.82) U6.25@16.214,81.44 ; 15.834,81.282 cw(c15.834,80.744) U6.25@16.214,81.124 ; 15.834,81.282 ccw(c15.834,81.82) U6.25@16.214,81.44 ; 15.834,81.282 cw(c15.834,80.744) U6.25@16.214,81.124 ; 15.834,81.282 ccw(c15.834,81.82) U6.25@16.214,81.44 ; 15.834,81.282 cw(c15.834,80.744) U6.25@16.214,81.124 ; U6.25@17.63,81.124 cw(c17.949,80.805) 17.949,81.257 ; U6.25@17.63,81.124 cw(c17.949,80.805) 17.949,81.257 ; U6.25@17.63,81.124 cw(c17.949,80.805) 17.949,81.257 ; U6.25@17.63,81.44 ccw(c18.072,81.882) 18.072,81.257 ; U6.25@17.63,81.44 ccw(c18.072,81.882) 18.072,81.257 ; U6.25@17.63,81.44 ccw(c18.072,81.882) 18.072,81.257 ; v1@22.236,61.128 ccw(c21.803,61.561) 22.416,61.561 ; v1@22.236,61.128 ccw(c21.803,61.561) 22.416,61.561 ; v1@22.236,61.128 ccw(c21.803,61.561) 22.416,61.561 ; 22.416,61.561 ccw(c23.029,61.561) v1@22.596,61.128 ; 22.416,61.561 ccw(c23.029,61.561) v1@22.596,61.128 ; 22.416,61.561 ccw(c23.029,61.561) v1@22.596,61.128
  Bottom Layer w0.254: v1(22.416,60.948) 23.178,60.186 P8.3@85.154,60.186 ; v1@22.416,60.694 cw(c22.416,60.081) 22.85,60.514 ; v1@22.416,60.694 cw(c22.416,60.081) 22.85,60.514 ; v1@22.416,60.694 cw(c22.416,60.081) 22.85,60.514 ; v1@22.67,60.948 ccw(c23.283,60.948) 22.85,60.514 ; v1@22.67,60.948 ccw(c23.283,60.948) 22.85,60.514 ; v1@22.67,60.948 ccw(c23.283,60.948) 22.85,60.514 ; 83.65,60.186 ccw(c83.65,61.69) P8.3@84.713,60.627 ; 83.65,60.186 cw(c83.65,58.682) P8.3@84.713,59.745 ; 83.65,60.186 ccw(c83.65,61.69) P8.3@84.713,60.627 ; 83.65,60.186 cw(c83.65,58.682) P8.3@84.713,59.745 ; 83.65,60.186 ccw(c83.65,61.69) P8.3@84.713,60.627 ; 83.65,60.186 cw(c83.65,58.682) P8.3@84.713,59.745 ; 84.263,60.186 ccw(c84.263,61.077) P8.3@84.893,60.447 ; 84.263,60.186 cw(c84.263,59.295) P8.3@84.893,59.925 ; 84.263,60.186 ccw(c84.263,61.077) P8.3@84.893,60.447 ; 84.263,60.186 cw(c84.263,59.295) P8.3@84.893,59.925 ; 84.263,60.186 ccw(c84.263,61.077) P8.3@84.893,60.447 ; 84.263,60.186 cw(c84.263,59.295) P8.3@84.893,59.925
NetP8_4: P8.4 R13.2 U6.26 | length 119.9
  Top Layer w0.254: R13.2@13.65,79.248 14.732,79.248 ; U6.26@16.744,80.257 20.633,80.257 21.146,79.744 v1(21.146,59.932) ; U6.26@16.922,80.282 15.766,80.282 14.732,79.248 ; R13.2@14.06,78.923 cw(c14.732,78.39) 14.732,79.248 ; R13.2@14.06,78.923 cw(c14.732,78.39) 14.732,79.248 ; R13.2@14.06,78.923 cw(c14.732,78.39) 14.732,79.248 ; R13.2@14.06,79.573 ccw(c14.732,80.106) 14.732,79.248 ; R13.2@14.06,79.573 ccw(c14.732,80.106) 14.732,79.248 ; R13.2@14.06,79.573 ccw(c14.732,80.106) 14.732,79.248 ; 15.834,80.282 ccw(c15.834,80.82) U6.26@16.214,80.44 ; 15.834,80.282 cw(c15.834,79.744) U6.26@16.214,80.124 ; 15.834,80.282 ccw(c15.834,80.82) U6.26@16.214,80.44 ; 15.834,80.282 cw(c15.834,79.744) U6.26@16.214,80.124 ; 15.834,80.282 ccw(c15.834,80.82) U6.26@16.214,80.44 ; 15.834,80.282 cw(c15.834,79.744) U6.26@16.214,80.124 ; U6.26@17.63,80.124 cw(c17.949,79.805) 17.949,80.257 ; U6.26@17.63,80.124 cw(c17.949,79.805) 17.949,80.257 ; U6.26@17.63,80.124 cw(c17.949,79.805) 17.949,80.257 ; U6.26@17.63,80.44 ccw(c18.072,80.882) 18.072,80.257 ; U6.26@17.63,80.44 ccw(c18.072,80.882) 18.072,80.257 ; U6.26@17.63,80.44 ccw(c18.072,80.882) 18.072,80.257 ; v1@20.966,60.112 ccw(c20.533,60.545) 21.146,60.545 ; v1@20.966,60.112 ccw(c20.533,60.545) 21.146,60.545 ; v1@20.966,60.112 ccw(c20.533,60.545) 21.146,60.545 ; 21.146,60.545 ccw(c21.759,60.545) v1@21.326,60.112 ; 21.146,60.545 ccw(c21.759,60.545) v1@21.326,60.112 ; 21.146,60.545 ccw(c21.759,60.545) v1@21.326,60.112
  Bottom Layer w0.254: v1(21.146,59.932) 21.908,59.17 62.802,59.17 64.326,57.646 P8.4@85.154,57.646 ; v1@21.146,59.678 cw(c21.146,59.065) 21.58,59.498 ; v1@21.146,59.678 cw(c21.146,59.065) 21.58,59.498 ; v1@21.146,59.678 cw(c21.146,59.065) 21.58,59.498 ; v1@21.4,59.932 ccw(c22.013,59.932) 21.58,59.498 ; v1@21.4,59.932 ccw(c22.013,59.932) 21.58,59.498 ; v1@21.4,59.932 ccw(c22.013,59.932) 21.58,59.498 ; 83.65,57.646 ccw(c83.65,59.15) P8.4@84.713,58.087 ; 83.65,57.646 cw(c83.65,56.142) P8.4@84.713,57.205 ; 83.65,57.646 ccw(c83.65,59.15) P8.4@84.713,58.087 ; 83.65,57.646 cw(c83.65,56.142) P8.4@84.713,57.205 ; 83.65,57.646 ccw(c83.65,59.15) P8.4@84.713,58.087 ; 83.65,57.646 cw(c83.65,56.142) P8.4@84.713,57.205 ; 84.263,57.646 ccw(c84.263,58.537) P8.4@84.893,57.907 ; 84.263,57.646 cw(c84.263,56.755) P8.4@84.893,57.385 ; 84.263,57.646 ccw(c84.263,58.537) P8.4@84.893,57.907 ; 84.263,57.646 cw(c84.263,56.755) P8.4@84.893,57.385 ; 84.263,57.646 ccw(c84.263,58.537) P8.4@84.893,57.907 ; 84.263,57.646 cw(c84.263,56.755) P8.4@84.893,57.385
NetQ6_1: Q6.1 R28.1 | length 5.4
  Top Layer w0.762: R28.1@67.181,56.249 67.308,56.122 Q6.1@67.308,53.487 ; R28.1@66.991,55.959 cw(c66.225,55.193) 67.308,55.193 ; R28.1@66.991,55.959 cw(c66.225,55.193) 67.308,55.193 ; R28.1@66.991,55.959 cw(c66.225,55.193) 67.308,55.193
NRST: C8.2 P1.2 R1.1 S1.2 S1.3 U1.7 | length 267.8
  Top Layer w0.254: S1.2@-1.169,79.198 S1.3@-1.169,85.802 ; R1.1@6.35,81.07 v1(6.35,84.184) C8.2@6.35,84.25 ; v1(26.099,63.547) v1(26.099,84.189) ; v1(60.516,88.888) 60.389,88.761 60.774,88.376 ; U1.7@60.774,83.717 60.774,88.376 ; S1.2@-1.786,79.815 ccw(c-3.277,81.306) -1.169,81.306 ; S1.2@-1.786,79.815 ccw(c-3.277,81.306) -1.169,81.306 ; S1.2@-1.786,79.815 ccw(c-3.277,81.306) -1.169,81.306 ; S1.3@-1.786,85.185 cw(c-3.277,83.694) -1.169,83.694 ; S1.3@-1.786,85.185 cw(c-3.277,83.694) -1.169,83.694 ; S1.3@-1.786,85.185 cw(c-3.277,83.694) -1.169,83.694 ; S1.2@-1.607,79.636 ccw(c-2.663,80.692) -1.169,80.692 ; S1.2@-1.607,79.636 ccw(c-2.663,80.692) -1.169,80.692 ; S1.2@-1.607,79.636 ccw(c-2.663,80.692) -1.169,80.692 ; S1.3@-1.607,85.364 cw(c-2.663,84.308) -1.169,84.308 ; S1.3@-1.607,85.364 cw(c-2.663,84.308) -1.169,84.308 ; S1.3@-1.607,85.364 cw(c-2.663,84.308) -1.169,84.308 ; -1.169,80.692 ccw(c0.325,80.692) S1.2@-0.731,79.636 ; -1.169,80.692 ccw(c0.325,80.692) S1.2@-0.731,79.636 ; -1.169,80.692 ccw(c0.325,80.692) S1.2@-0.731,79.636 ; -1.169,81.306 ccw(c0.939,81.306) S1.2@-0.552,79.815 ; -1.169,81.306 ccw(c0.939,81.306) S1.2@-0.552,79.815 ; -1.169,81.306 ccw(c0.939,81.306) S1.2@-0.552,79.815 ; -1.169,83.694 cw(c0.939,83.694) S1.3@-0.552,85.185 ; -1.169,83.694 cw(c0.939,83.694) S1.3@-0.552,85.185 ; -1.169,83.694 cw(c0.939,83.694) S1.3@-0.552,85.185 ; -1.169,84.308 cw(c0.325,84.308) S1.3@-0.731,85.364 ; -1.169,84.308 cw(c0.325,84.308) S1.3@-0.731,85.364 ; -1.169,84.308 cw(c0.325,84.308) S1.3@-0.731,85.364 ; R1.1@5.98,81.44 ccw(c5.087,82.333) 6.35,82.333 ; R1.1@5.98,81.44 ccw(c5.087,82.333) 6.35,82.333 ; R1.1@5.98,81.44 ccw(c5.087,82.333) 6.35,82.333 ; C8.2@5.98,83.88 cw(c5.087,82.987) 6.35,82.987 ; C8.2@5.98,83.88 cw(c5.087,82.987) 6.35,82.987 ; C8.2@5.98,83.88 cw(c5.087,82.987) 6.35,82.987 ; C8.2@6.17,84.004 cw(c5.737,83.571) 6.35,83.571 ; C8.2@6.17,84.004 cw(c5.737,83.571) 6.35,83.571 ; C8.2@6.17,84.004 cw(c5.737,83.571) 6.35,83.571 ; 6.35,82.333 ccw(c7.613,82.333) R1.1@6.72,81.44 ; 6.35,82.333 ccw(c7.613,82.333) R1.1@6.72,81.44 ; 6.35,82.333 ccw(c7.613,82.333) R1.1@6.72,81.44 ; 6.35,82.987 cw(c7.613,82.987) C8.2@6.72,83.88 ; 6.35,82.987 cw(c7.613,82.987) C8.2@6.72,83.88 ; 6.35,82.987 cw(c7.613,82.987) C8.2@6.72,83.88 ; 6.35,83.571 cw(c6.963,83.571) C8.2@6.53,84.004 ; 6.35,83.571 cw(c6.963,83.571) C8.2@6.53,84.004 ; 6.35,83.571 cw(c6.963,83.571) C8.2@6.53,84.004 ; v1@25.919,63.726 ccw(c25.486,64.16) 26.099,64.16 ; v1@25.919,63.726 ccw(c25.486,64.16) 26.099,64.16 ; v1@25.919,63.726 ccw(c25.486,64.16) 26.099,64.16 ; v1@25.919,84.009 cw(c25.486,83.576) 26.099,83.576 ; v1@25.919,84.009 cw(c25.486,83.576) 26.099,83.576 ; v1@25.919,84.009 cw(c25.486,83.576) 26.099,83.576 ; 26.099,64.16 ccw(c26.712,64.16) v1@26.279,63.726 ; 26.099,64.16 ccw(c26.712,64.16) v1@26.279,63.726 ; 26.099,64.16 ccw(c26.712,64.16) v1@26.279,63.726 ; 26.099,83.576 cw(c26.712,83.576) v1@26.279,84.009 ; 26.099,83.576 cw(c26.712,83.576) v1@26.279,84.009 ; 26.099,83.576 cw(c26.712,83.576) v1@26.279,84.009 ; v1@60.731,88.753 ccw(c60.989,88.591) 60.774,88.376 ; v1@60.731,88.753 ccw(c60.989,88.591) 60.774,88.376 ; v1@60.731,88.753 ccw(c60.989,88.591) 60.774,88.376
  Bottom Layer w0.254: S1.3@-1.169,85.802 -1.169,84.845 -0.508,84.184 ; v1(26.099,63.547) 81.408,63.547 81.852,63.991 87.318,63.991 P1.2@88.583,62.726 ; v1(60.516,88.888) 60.389,88.761 60.135,89.015 54.928,89.015 54.293,88.38 38.926,88.38 34.73,84.184 v1(6.35,84.184) -0.508,84.184 ; S1.3@-1.087,85.727 ccw(c-0.567,85.245) -1.068,84.744 ; S1.3@-1.087,85.727 ccw(c-0.567,85.245) -1.068,84.744 ; S1.3@-1.087,85.727 ccw(c-0.567,85.245) -1.068,84.744 ; S1.3@-0.901,85.554 ccw(c-0.373,85.066) -0.882,84.558 ; S1.3@-0.901,85.554 ccw(c-0.373,85.066) -0.882,84.558 ; S1.3@-0.901,85.554 ccw(c-0.373,85.066) -0.882,84.558 ; S1.3@-0.715,85.382 ccw(c-0.179,84.887) -0.695,84.371 ; S1.3@-0.715,85.382 ccw(c-0.179,84.887) -0.695,84.371 ; S1.3@-0.715,85.382 ccw(c-0.179,84.887) -0.695,84.371 ; S1.3@-0.528,85.209 ccw(c0.015,84.707) -0.508,84.184 ; S1.3@-0.528,85.209 ccw(c0.015,84.707) -0.508,84.184 ; S1.3@-0.528,85.209 ccw(c0.015,84.707) -0.508,84.184 ; 5.737,84.184 ccw(c5.737,84.797) v1@6.17,84.364 ; 5.737,84.184 cw(c5.737,83.571) v1@6.17,84.004 ; 5.737,84.184 ccw(c5.737,84.797) v1@6.17,84.364 ; 5.737,84.184 cw(c5.737,83.571) v1@6.17,84.004 ; 5.737,84.184 ccw(c5.737,84.797) v1@6.17,84.364 ; 5.737,84.184 cw(c5.737,83.571) v1@6.17,84.004 ; v1@6.53,84.004 cw(c6.963,83.571) 6.963,84.184 ; v1@6.53,84.004 cw(c6.963,83.571) 6.963,84.184 ; v1@6.53,84.004 cw(c6.963,83.571) 6.963,84.184 ; v1@6.53,84.364 ccw(c6.963,84.797) 6.963,84.184 ; v1@6.53,84.364 ccw(c6.963,84.797) 6.963,84.184 ; v1@6.53,84.364 ccw(c6.963,84.797) 6.963,84.184 ; 25.474,84.184 ccw(c25.474,84.814) v1@25.919,84.369 ; 25.474,84.184 ccw(c25.474,84.814) v1@25.919,84.369 ; 25.474,84.184 ccw(c25.474,84.814) v1@25.919,84.369 ; 25.498,84.184 cw(c25.498,83.588) v1@25.919,84.009 ; 25.498,84.184 cw(c25.498,83.588) v1@25.919,84.009 ; 25.498,84.184 cw(c25.498,83.588) v1@25.919,84.009 ; v1@26.279,63.367 cw(c26.712,62.933) 26.712,63.547 ; v1@26.279,63.367 cw(c26.712,62.933) 26.712,63.547 ; v1@26.279,63.367 cw(c26.712,62.933) 26.712,63.547 ; v1@26.279,63.726 ccw(c26.712,64.16) 26.712,63.547 ; v1@26.279,63.726 ccw(c26.712,64.16) 26.712,63.547 ; v1@26.279,63.726 ccw(c26.712,64.16) 26.712,63.547 ; v1@26.279,84.009 cw(c26.7,83.588) 26.7,84.184 ; v1@26.279,84.009 cw(c26.7,83.588) 26.7,84.184 ; v1@26.279,84.009 cw(c26.7,83.588) 26.7,84.184 ; v1@26.279,84.369 ccw(c26.724,84.814) 26.724,84.184 ; v1@26.279,84.369 ccw(c26.724,84.814) 26.724,84.184 ; v1@26.279,84.369 ccw(c26.724,84.814) 26.724,84.184 ; 59.596,89.015 cw(c59.596,87.968) v1@60.336,88.708 ; 59.596,89.015 cw(c59.596,87.968) v1@60.336,88.708 ; 59.596,89.015 cw(c59.596,87.968) v1@60.336,88.708 ; 87.519,63.79 ccw(c88.583,64.853) P1.2@88.583,63.349 ; 87.519,63.79 cw(c86.456,62.726) P1.2@87.96,62.726 ; 87.519,63.79 ccw(c88.583,64.853) P1.2@88.583,63.349 ; 87.519,63.79 cw(c86.456,62.726) P1.2@87.96,62.726 ; 87.519,63.79 ccw(c88.583,64.853) P1.2@88.583,63.349 ; 87.519,63.79 cw(c86.456,62.726) P1.2@87.96,62.726 ; 87.808,63.294 ccw(c88.751,63.546) P1.2@88.555,62.59 ; 87.808,63.294 ccw(c88.751,63.546) P1.2@88.555,62.59 ; 87.808,63.294 ccw(c88.751,63.546) P1.2@88.555,62.59 ; 87.953,63.356 ccw(c88.583,63.986) P1.2@88.583,63.095 ; 87.953,63.356 cw(c87.323,62.726) P1.2@88.214,62.726 ; 87.953,63.356 ccw(c88.583,63.986) P1.2@88.583,63.095 ; 87.953,63.356 cw(c87.323,62.726) P1.2@88.214,62.726 ; 87.953,63.356 ccw(c88.583,63.986) P1.2@88.583,63.095 ; 87.953,63.356 cw(c87.323,62.726) P1.2@88.214,62.726 ; 88.015,63.501 cw(c87.763,62.558) P1.2@88.719,62.754 ; 88.015,63.501 cw(c87.763,62.558) P1.2@88.719,62.754 ; 88.015,63.501 cw(c87.763,62.558) P1.2@88.719,62.754
OSC32_IN: C9.1 U1.3 Y1.1 | length 35.6
  Top Layer w0.254: U1.3@62.774,83.717 62.774,86.574 Y1.1@64.326,88.126 64.326,87.422 ; C9.1@75.187,87.872 74.681,87.872 74.007,87.198 ; 63.689,87.489 ccw(c63.053,88.126) Y1.1@63.953,88.126 ; 63.689,87.489 cw(c64.326,86.853) Y1.1@64.326,87.753 ; 63.689,87.489 ccw(c63.053,88.126) Y1.1@63.953,88.126 ; 63.689,87.489 cw(c64.326,86.853) Y1.1@64.326,87.753 ; 63.689,87.489 ccw(c63.053,88.126) Y1.1@63.953,88.126 ; 63.689,87.489 cw(c64.326,86.853) Y1.1@64.326,87.753 ; 63.884,87.867 cw(c64.408,87.727) Y1.1@64.299,88.258 ; 63.884,87.867 cw(c64.408,87.727) Y1.1@64.299,88.258 ; 63.884,87.867 cw(c64.408,87.727) Y1.1@64.299,88.258 ; 64.067,87.684 ccw(c63.927,88.208) Y1.1@64.458,88.099 ; 64.067,87.684 ccw(c63.927,88.208) Y1.1@64.458,88.099 ; 64.067,87.684 ccw(c63.927,88.208) Y1.1@64.458,88.099 ; Y1.1@64.117,87.817 cw(c63.848,87.422) 64.326,87.422 ; Y1.1@64.117,87.817 cw(c63.848,87.422) 64.326,87.422 ; Y1.1@64.117,87.817 cw(c63.848,87.422) 64.326,87.422 ; 64.326,87.422 cw(c64.804,87.422) Y1.1@64.535,87.817 ; 64.326,87.422 cw(c64.804,87.422) Y1.1@64.535,87.817 ; 64.326,87.422 cw(c64.804,87.422) Y1.1@64.535,87.817 ; 64.326,87.422 64.551,87.198 74.007,87.198 ; 74.007,87.198 cw(c74.545,86.659) C9.1@74.926,87.319 ; 74.007,87.198 cw(c74.545,86.659) C9.1@74.926,87.319 ; 74.007,87.198 cw(c74.545,86.659) C9.1@74.926,87.319 ; 74.241,87.432 cw(c74.717,86.956) C9.1@75.053,87.539 ; 74.241,87.432 cw(c74.717,86.956) C9.1@75.053,87.539 ; 74.241,87.432 cw(c74.717,86.956) C9.1@75.053,87.539 ; 74.475,87.666 cw(c74.888,87.253) C9.1@75.18,87.759 ; 74.475,87.666 cw(c74.888,87.253) C9.1@75.18,87.759 ; 74.475,87.666 cw(c74.888,87.253) C9.1@75.18,87.759
OSC32_OUT: C10.1 U1.4 Y1.2 | length 51.4
  Top Layer w0.254: U1.4@62.274,83.717 62.274,87.852 Y1.2@64.326,89.904 65.845,91.423 73.795,91.423 C10.1@75.187,90.031 ; 63.689,89.267 ccw(c63.053,89.904) Y1.2@63.953,89.904 ; 63.689,89.267 cw(c64.326,88.631) Y1.2@64.326,89.531 ; 63.689,89.267 ccw(c63.053,89.904) Y1.2@63.953,89.904 ; 63.689,89.267 cw(c64.326,88.631) Y1.2@64.326,89.531 ; 63.689,89.267 ccw(c63.053,89.904) Y1.2@63.953,89.904 ; 63.689,89.267 cw(c64.326,88.631) Y1.2@64.326,89.531 ; 63.884,89.645 cw(c64.408,89.505) Y1.2@64.299,90.036 ; 63.884,89.645 cw(c64.408,89.505) Y1.2@64.299,90.036 ; 63.884,89.645 cw(c64.408,89.505) Y1.2@64.299,90.036 ; 64.067,89.462 ccw(c63.927,89.986) Y1.2@64.458,89.877 ; 64.067,89.462 ccw(c63.927,89.986) Y1.2@64.458,89.877 ; 64.067,89.462 ccw(c63.927,89.986) Y1.2@64.458,89.877 ; Y1.2@64.194,89.931 cw(c64.725,89.822) 64.585,90.346 ; Y1.2@64.194,89.931 cw(c64.725,89.822) 64.585,90.346 ; Y1.2@64.194,89.931 cw(c64.725,89.822) 64.585,90.346 ; Y1.2@64.326,90.277 ccw(c64.326,91.178) 64.963,90.541 ; Y1.2@64.326,90.277 ccw(c64.326,91.178) 64.963,90.541 ; Y1.2@64.326,90.277 ccw(c64.326,91.178) 64.963,90.541 ; Y1.2@64.353,89.772 ccw(c64.244,90.303) 64.768,90.163 ; Y1.2@64.353,89.772 ccw(c64.244,90.303) 64.768,90.163 ; Y1.2@64.353,89.772 ccw(c64.244,90.303) 64.768,90.163 ; Y1.2@64.699,89.904 cw(c65.6,89.904) 64.963,90.541 ; Y1.2@64.699,89.904 cw(c65.6,89.904) 64.963,90.541 ; Y1.2@64.699,89.904 cw(c65.6,89.904) 64.963,90.541 ; 74.123,91.095 ccw(c75.187,92.158) C10.1@75.187,90.654 ; 74.123,91.095 ccw(c75.187,92.158) C10.1@75.187,90.654 ; 74.123,91.095 ccw(c75.187,92.158) C10.1@75.187,90.654 ; 74.365,90.853 cw(c73.643,90.131) C10.1@74.664,90.131 ; 74.365,90.853 cw(c73.643,90.131) C10.1@74.664,90.131 ; 74.365,90.853 cw(c73.643,90.131) C10.1@74.664,90.131 ; 74.444,90.853 cw(c74.176,89.856) C10.1@75.173,90.127 ; 74.444,90.853 cw(c74.176,89.856) C10.1@75.173,90.127 ; 74.444,90.853 cw(c74.176,89.856) C10.1@75.173,90.127 ; 74.498,90.752 ccw(c75.297,90.967) C10.1@75.189,90.146 ; 74.498,90.752 ccw(c75.297,90.967) C10.1@75.189,90.146 ; 74.498,90.752 ccw(c75.297,90.967) C10.1@75.189,90.146 ; C10.1@74.557,90.661 ccw(c75.187,91.291) C10.1@75.187,90.4 ; C10.1@74.557,90.661 ccw(c75.187,91.291) C10.1@75.187,90.4 ; C10.1@74.557,90.661 ccw(c75.187,91.291) C10.1@75.187,90.4 ; C10.1@74.87,90.739 cw(c74.67,89.99) C10.1@75.418,90.194 ; C10.1@74.87,90.739 cw(c74.67,89.99) C10.1@75.418,90.194 ; C10.1@74.87,90.739 cw(c74.67,89.99) C10.1@75.418,90.194
OSC_IN: C11.1 R4.2 U1.5 Y2.2 | length 64.2
  Top Layer w0.254: C11.1@51.057,86.094 R4.2@48.512,86.094 48.512,88.754 Y2.2@49.784,90.026 50.419,90.661 ; U1.5@61.774,83.717 61.774,89.899 61.012,90.661 50.419,90.661 ; R4.2@48.142,86.564 ccw(c47.249,87.457) 48.512,87.457 ; R4.2@48.142,86.564 ccw(c47.249,87.457) 48.512,87.457 ; R4.2@48.142,86.564 ccw(c47.249,87.457) 48.512,87.457 ; 48.512,87.457 ccw(c49.775,87.457) R4.2@48.882,86.564 ; 48.512,87.457 ccw(c49.775,87.457) R4.2@48.882,86.564 ; 48.512,87.457 ccw(c49.775,87.457) R4.2@48.882,86.564 ; 48.7,88.942 ccw(c47.616,90.026) Y2.2@49.149,90.026 ; 48.7,88.942 cw(c49.784,87.858) Y2.2@49.784,89.391 ; 48.7,88.942 ccw(c47.616,90.026) Y2.2@49.149,90.026 ; 48.7,88.942 cw(c49.784,87.858) Y2.2@49.784,89.391 ; 48.7,88.942 ccw(c47.616,90.026) Y2.2@49.149,90.026 ; 48.7,88.942 cw(c49.784,87.858) Y2.2@49.784,89.391 ; R4.2@48.882,85.724 cw(c49.775,84.831) 49.775,86.094 ; R4.2@48.882,85.724 cw(c49.775,84.831) 49.775,86.094 ; R4.2@48.882,85.724 cw(c49.775,84.831) 49.775,86.094 ; R4.2@48.882,86.464 ccw(c49.775,87.357) 49.775,86.094 ; R4.2@48.882,86.464 ccw(c49.775,87.357) 49.775,86.094 ; R4.2@48.882,86.464 ccw(c49.775,87.357) 49.775,86.094 ; 48.988,89.425 cw(c49.961,89.164) Y2.2@49.759,90.15 ; 48.988,89.425 cw(c49.961,89.164) Y2.2@49.759,90.15 ; 48.988,89.425 cw(c49.961,89.164) Y2.2@49.759,90.15 ; 49.134,89.376 ccw(c48.483,90.026) Y2.2@49.403,90.026 ; 49.134,89.376 cw(c49.784,88.725) Y2.2@49.784,89.645 ; 49.134,89.376 ccw(c48.483,90.026) Y2.2@49.403,90.026 ; 49.134,89.376 cw(c49.784,88.725) Y2.2@49.784,89.645 ; 49.134,89.376 ccw(c48.483,90.026) Y2.2@49.403,90.026 ; 49.134,89.376 cw(c49.784,88.725) Y2.2@49.784,89.645 ; 49.183,89.23 ccw(c48.922,90.203) Y2.2@49.908,90.001 ; 49.183,89.23 ccw(c48.922,90.203) Y2.2@49.908,90.001 ; 49.183,89.23 ccw(c48.922,90.203) Y2.2@49.908,90.001 ; 49.794,86.094 ccw(c49.794,87.357) C11.1@50.687,86.464 ; 49.794,86.094 cw(c49.794,84.831) C11.1@50.687,85.724 ; 49.794,86.094 ccw(c49.794,87.357) C11.1@50.687,86.464 ; 49.794,86.094 cw(c49.794,84.831) C11.1@50.687,85.724 ; 49.794,86.094 ccw(c49.794,87.357) C11.1@50.687,86.464 ; 49.794,86.094 cw(c49.794,84.831) C11.1@50.687,85.724 ; Y2.2@50.058,90.599 ccw(c50.195,90.885) 50.419,90.661 ; Y2.2@50.058,90.599 ccw(c50.195,90.885) 50.419,90.661 ; Y2.2@50.058,90.599 ccw(c50.195,90.885) 50.419,90.661 ; Y2.2@50.357,90.3 cw(c50.643,90.437) 50.419,90.661 ; Y2.2@50.357,90.3 cw(c50.643,90.437) 50.419,90.661 ; Y2.2@50.357,90.3 cw(c50.643,90.437) 50.419,90.661
OSC_OUT: C12.1 R4.1 U1.6 Y2.1 | length 77.1
  Top Layer w0.254: C12.1@43.94,86.094 R4.1@46.096,86.094 ; Y2.1@44.704,90.026 46.612,88.118 R4.1@46.612,86.094 ; v1(53.721,89.904) 53.726,89.899 60.706,89.899 61.274,89.331 U1.6@61.274,83.717 ; C12.1@44.31,85.724 cw(c45.203,84.831) 45.203,86.094 ; C12.1@44.31,85.724 cw(c45.203,84.831) 45.203,86.094 ; C12.1@44.31,85.724 cw(c45.203,84.831) 45.203,86.094 ; C12.1@44.31,86.464 ccw(c45.203,87.357) 45.203,86.094 ; C12.1@44.31,86.464 ccw(c45.203,87.357) 45.203,86.094 ; C12.1@44.31,86.464 ccw(c45.203,87.357) 45.203,86.094 ; Y2.1@44.58,90.001 ccw(c45.566,90.203) 45.306,89.23 ; Y2.1@44.58,90.001 ccw(c45.566,90.203) 45.306,89.23 ; Y2.1@44.58,90.001 ccw(c45.566,90.203) 45.306,89.23 ; Y2.1@44.704,89.391 cw(c44.704,87.858) 45.788,88.942 ; Y2.1@44.704,89.391 cw(c44.704,87.858) 45.788,88.942 ; Y2.1@44.704,89.391 cw(c44.704,87.858) 45.788,88.942 ; Y2.1@44.704,89.645 cw(c44.704,88.725) 45.354,89.376 ; Y2.1@44.704,89.645 cw(c44.704,88.725) 45.354,89.376 ; Y2.1@44.704,89.645 cw(c44.704,88.725) 45.354,89.376 ; Y2.1@44.729,90.15 cw(c44.527,89.164) 45.5,89.425 ; Y2.1@44.729,90.15 cw(c44.527,89.164) 45.5,89.425 ; Y2.1@44.729,90.15 cw(c44.527,89.164) 45.5,89.425 ; Y2.1@45.085,90.026 ccw(c46.005,90.026) 45.354,89.376 ; Y2.1@45.085,90.026 ccw(c46.005,90.026) 45.354,89.376 ; Y2.1@45.085,90.026 ccw(c46.005,90.026) 45.354,89.376 ; Y2.1@45.339,90.026 ccw(c46.872,90.026) 45.788,88.942 ; Y2.1@45.339,90.026 ccw(c46.872,90.026) 45.788,88.942 ; Y2.1@45.339,90.026 ccw(c46.872,90.026) 45.788,88.942 ; 45.349,86.094 ccw(c45.349,87.357) R4.1@46.242,86.464 ; 45.349,86.094 cw(c45.349,84.831) R4.1@46.242,85.724 ; 45.349,86.094 ccw(c45.349,87.357) R4.1@46.242,86.464 ; 45.349,86.094 cw(c45.349,84.831) R4.1@46.242,85.724 ; 45.349,86.094 ccw(c45.349,87.357) R4.1@46.242,86.464 ; 45.349,86.094 cw(c45.349,84.831) R4.1@46.242,85.724 ; R4.1@46.242,86.564 ccw(c45.349,87.457) 46.612,87.457 ; R4.1@46.242,86.564 ccw(c45.349,87.457) 46.612,87.457 ; R4.1@46.242,86.564 ccw(c45.349,87.457) 46.612,87.457 ; 46.612,87.457 ccw(c47.875,87.457) R4.1@46.982,86.564 ; 46.612,87.457 ccw(c47.875,87.457) R4.1@46.982,86.564 ; 46.612,87.457 ccw(c47.875,87.457) R4.1@46.982,86.564 ; v1@53.901,89.724 cw(c54.322,89.303) 54.322,89.899 ; v1@53.901,89.724 cw(c54.322,89.303) 54.322,89.899 ; v1@53.901,89.724 cw(c54.322,89.303) 54.322,89.899 ; v1@53.901,90.084 ccw(c54.346,90.529) 54.346,89.899 ; v1@53.901,90.084 ccw(c54.346,90.529) 54.346,89.899 ; v1@53.901,90.084 ccw(c54.346,90.529) 54.346,89.899
  Bottom Layer w0.254: Y2.1@44.704,90.026 44.704,91.11 ; v1(53.721,89.904) 51.943,91.682 45.276,91.682 44.704,91.11 ; Y2.1@44.393,90.58 ccw(c44.096,91.11) 44.704,91.11 ; Y2.1@44.393,90.58 ccw(c44.096,91.11) 44.704,91.11 ; Y2.1@44.393,90.58 ccw(c44.096,91.11) 44.704,91.11 ; 44.704,91.11 ccw(c45.312,91.11) Y2.1@45.015,90.58 ; 44.704,91.11 ccw(c45.312,91.11) Y2.1@45.015,90.58 ; 44.704,91.11 ccw(c45.312,91.11) Y2.1@45.015,90.58 ; 53.287,90.338 ccw(c53.721,90.771) v1@53.721,90.158 ; 53.287,90.338 cw(c52.854,89.904) v1@53.467,89.904 ; 53.287,90.338 ccw(c53.721,90.771) v1@53.721,90.158 ; 53.287,90.338 cw(c52.854,89.904) v1@53.467,89.904 ; 53.287,90.338 ccw(c53.721,90.771) v1@53.721,90.158 ; 53.287,90.338 cw(c52.854,89.904) v1@53.467,89.904